# Altium PCB PCB1.PcbDoc
Units mil, origin at the board's own origin, x right, y up, seen from the top; angles counter-clockwise.
Board outline 6000 x 4000 mil, 2 copper layers (Top Layer, Bottom Layer); 27 components, 21 nets, 70 pads, 0 vias.
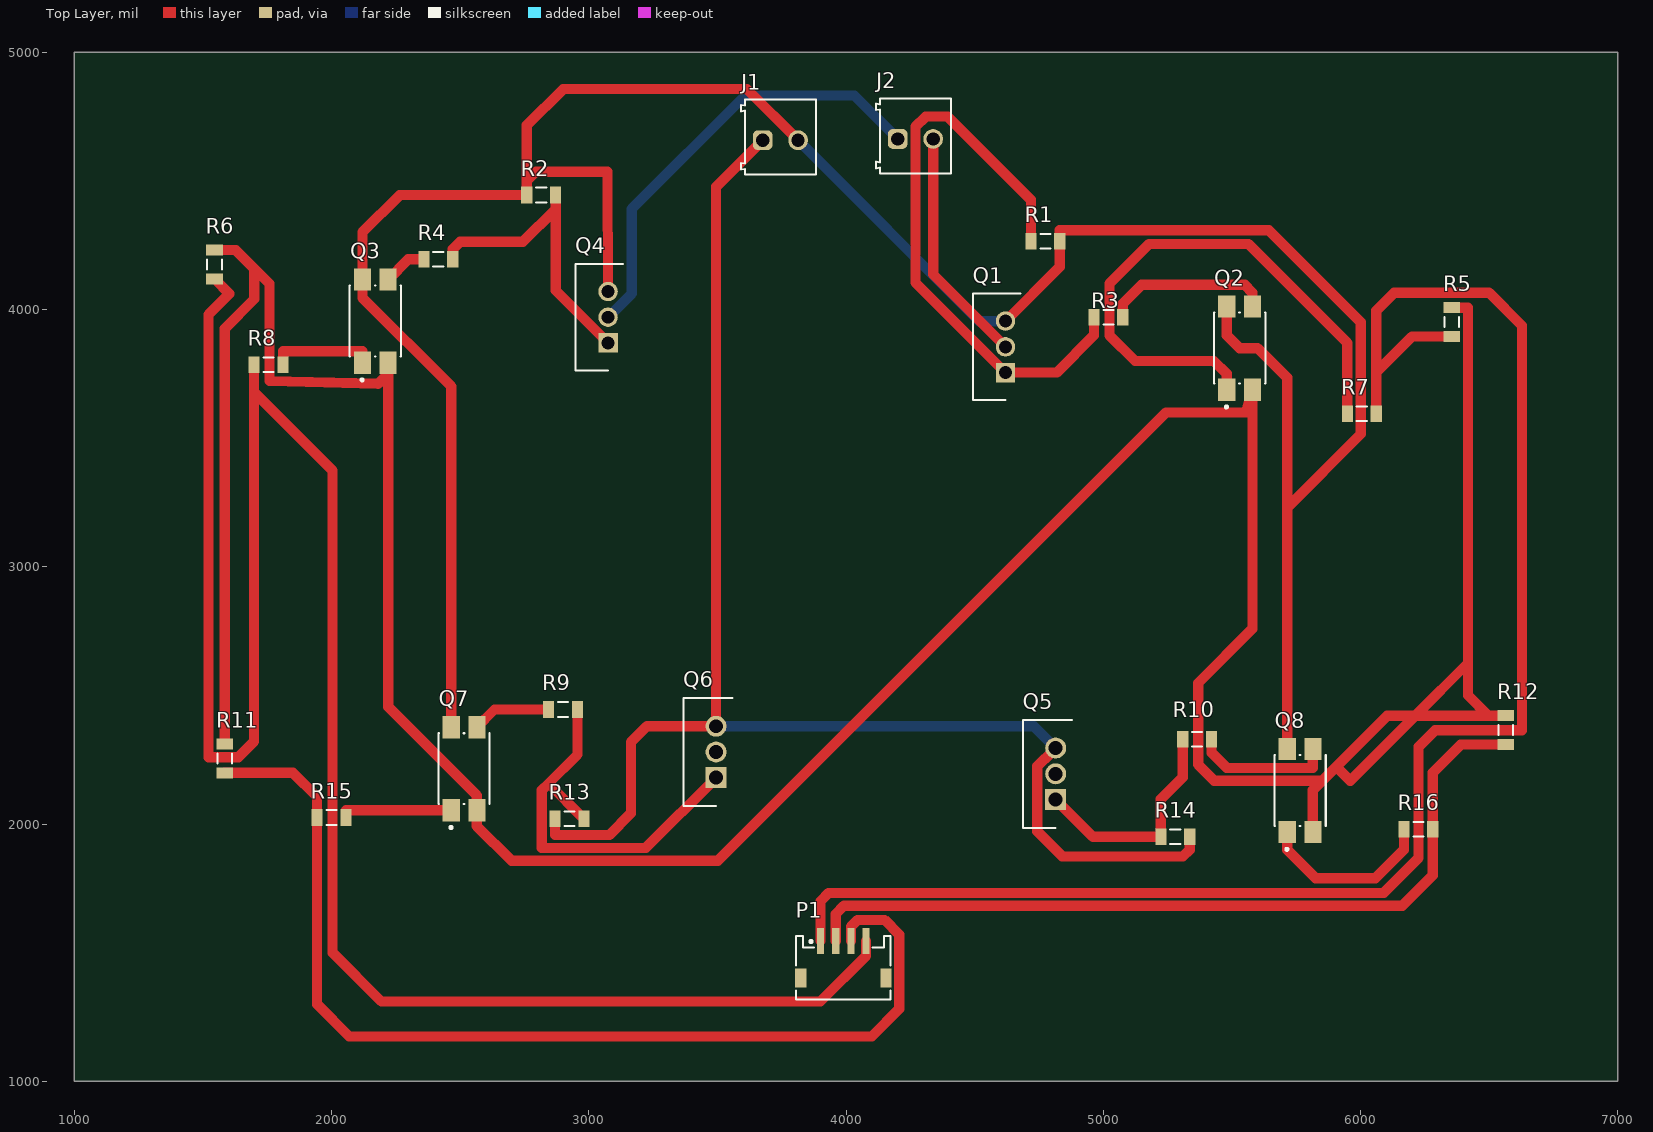
[diagram p0: Top Layer view]
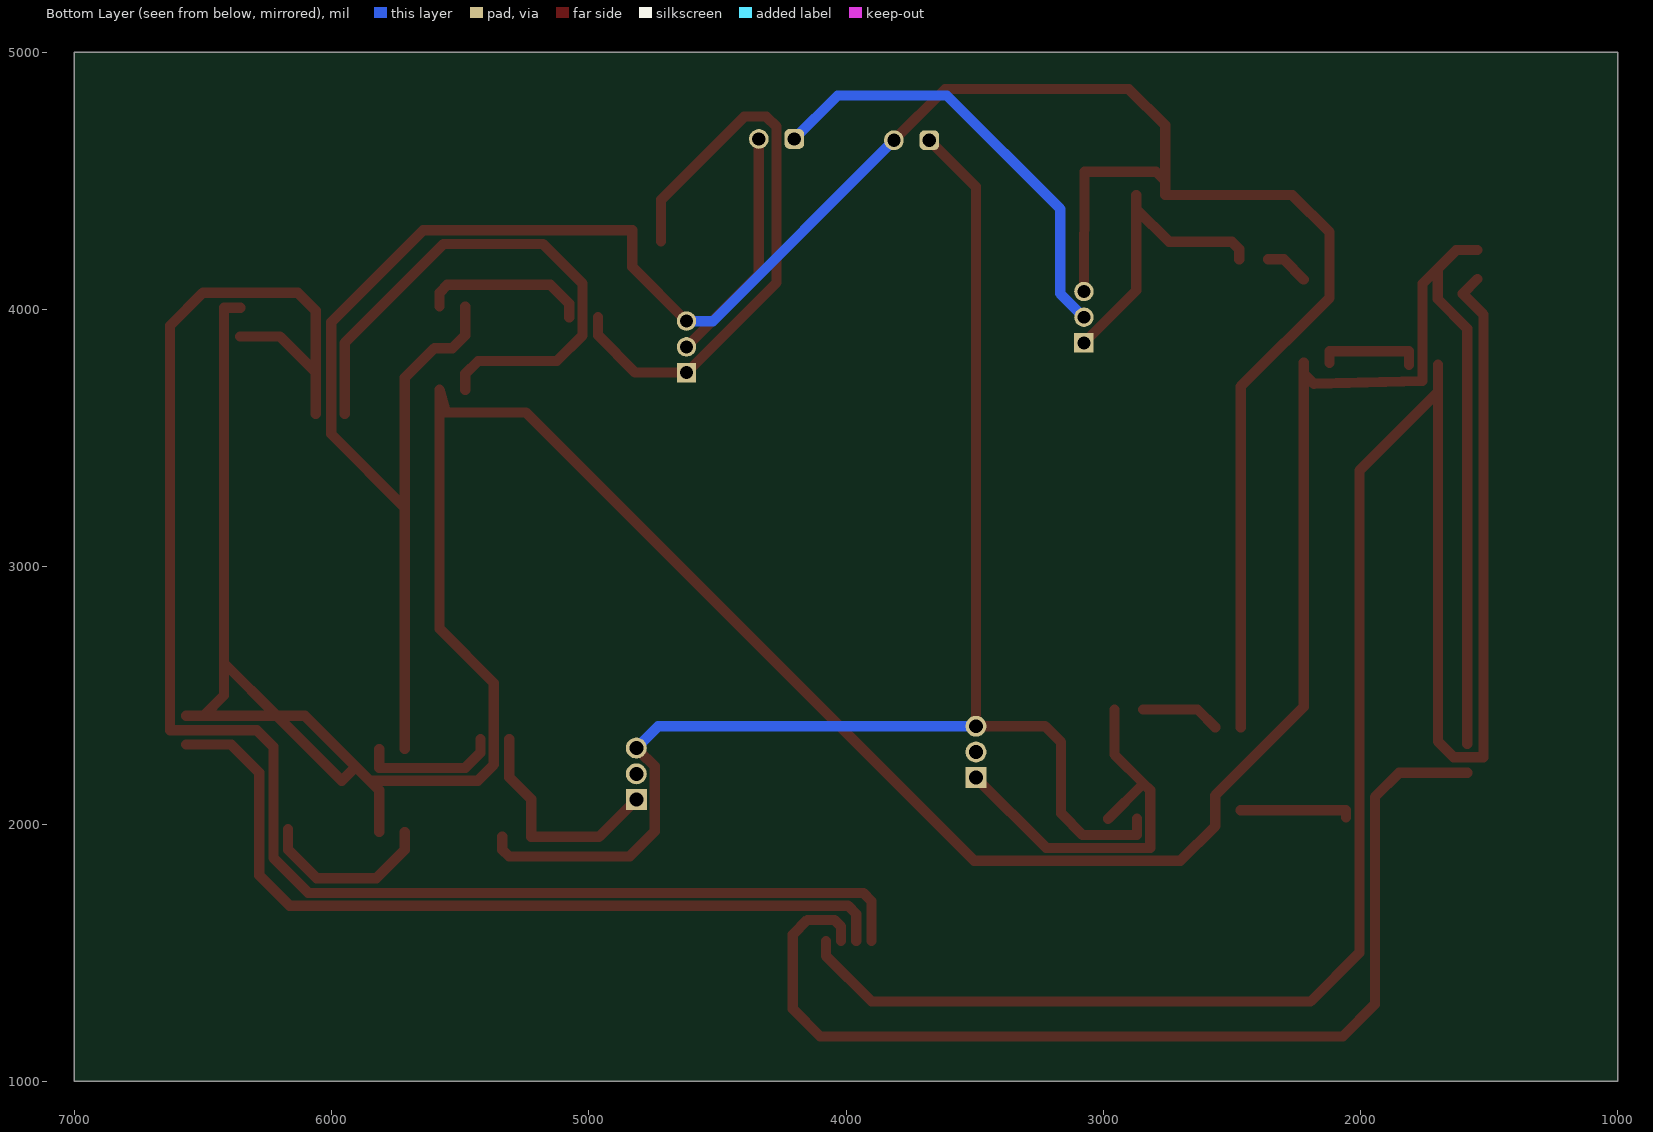
[diagram p1: Bottom Layer view, seen from below]

## Layer stack, top to bottom
Top Solder: solder mask 0.4, Solder Resist, Dk 3.5
Top Layer: signal copper 1.4
Dielectric 1: dielectric 12.6, FR-4, Dk 4.8
Bottom Layer: signal copper 1.4
Bottom Solder: solder mask 0.4, Solder Resist, Dk 3.5

## Board outline
1000,1000 7000,1000 7000,5000 1000,5000

## Design rules (kind name [scope] priority, off if disabled: settings)
Clearance [All] p1: gap=10 ignorepadtopadclearanceinfootprint=FALSE
PolygonConnect [All] p1: connectstyle=Relief reliefconductorwidth=10 reliefentries=4 polygonreliefangle="90 Angle" airgapwidth=10
RoutingVias [All] p1: holewidth=28 width=50 viastyle="Through Hole" minholewidth=28 minwidth=50 maxholewidth=28 maxwidth=50
SolderMaskExpansion [All] p1: expansion=4 istentingtop=FALSE
Width [All] p1: maxlimit=40 minlimit=40 preferedwidth=40 minimp=50.000000 maximp=50.000000 favimp=50.000000
30 further rules are at their usual default settings.

## Components (designator, comment, footprint, x,y, rotation, side; value= is the part's Value field where it differs from the comment)
J1 "691214110002" 691214110002 3745,4670 r0 top
J2 "691214110002" 691214110002 4270,4675 r0 top
P1 "648104131822" 648104131822 3989.53,1440.67 r0 top
Q1 "IRF4905" IRF4905_Footprint 4620,3755 r90 top
Q2 "PC817X4NIP0F" FP-PC817X4NIP0F-MFG 5530,3850 r90 top
Q3 "PC817X4NIP0F" FP-PC817X4NIP0F-MFG 2170,3955 r90 top
Q4 "IRF4905" IRF4905_Footprint 3075,3870 r90 top
Q5 "IRFZ44NPBF" IRFZ44NPBF_FOOTPRINT 4815,2095 r90 top
Q6 "IRFZ44NPBF" IRFZ44NPBF_FOOTPRINT 3495,2180 r90 top
Q7 "PC817X4NIP0F" FP-PC817X4NIP0F-MFG 2515,2215 r90 top
Q8 "PC817X4NIP0F" FP-PC817X4NIP0F-MFG 5765,2130 r90 top
R1 "10K" RESC3216X70X50NL05T20 4775,4265 r0 top
R2 "10K" RESC3216X70X50NL05T20 2815,4445 r0 top
R3 "50" RESC3216X70X50NL05T20 5020,3970 r0 top
R4 "50" RESC3216X70X50NL05T20 2415,4195 r0 top
R5 "10K" RESC3216X70X50NL05T20 6355,3951.1 r90 top
R6 "10K" RESC3216X70X50NL05T20 1545,4175 r90 top
R7 "100" RESC3216X70X50NL05T20 6005,3595 r0 top
R8 "100" RESC3216X70X50NL05T20 1755,3785 r0 top
R9 "50" RESC3216X70X50NL05T20 2900,2445 r0 top
R10 "50" RESC3216X70X50NL05T20 5365,2330 r0 top
R11 "10K" RESC3216X70X50NL05T20 1585,2255 r90 top
R12 "10K" RESC3216X70X50NL05T20 6565,2365 r90 top
R13 "10K" RESC3216X70X50NL05T20 2925,2020 r0 top
R14 "10K" RESC3216X70X50NL05T20 5280,1950 r0 top
R15 "100" RESC3216X70X50NL05T20 2000,2025 r0 top
R16 "100" RESC3216X70X50NL05T20 6225,1980 r0 top

## Footprints (in the part's own frame and the unit in brackets; to place one, negate y for a bottom-side part, rotate by r counter-clockwise, add the part's x,y. Pads: shape width x height; smd on the part's side, far side on the other; paste and mask are expansions set on the pad)
648104131822 [mm] "1.50mm SMT Male Horizontal Shrouded Header, 4p"
  rect 0.7x2.6 smd: 1(-2.25,2.65) 2(-0.75,2.65) 3(0.75,2.65) 4(2.25,2.65)
  rect 1.1x1.9 smd: MP1(-4.2,-1) MP2(4.2,-1)
  silkscreen extent -4.65,-3.13 4.65,3.13, body extent -4.6,-3 4.6,3.47, height 3.74
691214110002 [mm] "3.50 mm Horizontal Entry Modular, 2p"
  rrect50% 1.95x1.95 hole 1.3: 1(-1.75,-0.3)
  round 1.95 hole 1.3: 2(1.75,-0.3)
  silkscreen extent -3.9,-3.7 3.5,3.7, body extent -3.95,-3.7 3.5,3.7, height 8.55
FP-PC817X4NIP0F-MFG [mm]
  rect 2.2x1.7 smd paste+0 mask+0: 1(-4.1,1.27) 2(-4.1,-1.27) 3(4.1,-1.27) 4(4.1,1.27)
  silkscreen extent -5.92,-2.54 3.5,2.54, body extent -5.3,-2.64 5.3,2.64, height 0.25
IRF4905_Footprint [mm]
  rect 1.92x1.92 / inner round 1.92 / far side rect 1.92x1.92 hole 1.28: 1(0,0)
  round 1.92 hole 1.28: 2(2.54,0) 3(5.08,0)
  silkscreen extent -2.73,-1.49 7.81,3.2
IRFZ44NPBF_FOOTPRINT [mm]
  rect 2.07x2.07 / inner round 2.07 / far side rect 2.07x2.07 hole 1.38: 1(0,0)
  round 2.07 hole 1.38: 2(2.54,0) 3(5.08,0)
  silkscreen extent -2.8,-1.61 7.88,3.22
RESC3216X70X50NL05T20 [mm] "Chip Resistor, 2-Leads, Body 3.20x1.60mm, IPC Medium Density"
  rect 1.1x1.65 smd: 1(-1.425,0) 2(1.425,0)
  silkscreen extent -0.5,-0.73 0.5,0.73, body extent -1.63,-0.82 1.62,0.82, height 0.7

## Part data
J1 J2: library part CMP-1502-02464-2, Color="Blue, Green", Current=10A, Max Operating Temperature=105°C, Min Operating Temperature=-40°C, Voltage=300V, Contact Material=Brass, Contact Plating="Brass, Tin", Current Rating=10A, Height=8.7mm, Housing Material=Nylon, Lead Pitch=3.5mm, Length=7.4mm, Mount="Through Hole", NexarPartId=18818288, Number of Contacts=2, Number of Levels=1, Number of Pins=2, Number of Positions Per Level=2, Number of Rows=1, Packaging=Box, Pitch=3.5052mm, Plating="Brass, Steel", REACH SVHC=Unknown, RoHS=Compliant, Stripping Length=-6mm, Termination=Screw, Voltage Rating=300V, Width=7.9mm, Wire Gauge (Max)=24AWG, Wire Gauge (Min)=16AWG, Wire/Cable Gauge=24AWG
P1: library part CMP-1502-00732-2, Color="Beige, White", Contact Resistance=20mΩ, Current Rating=1A, Flammability Rating="UL94 V-0", Insulation Resistance=500MΩ, Max Operating Temperature=85°C, Min Operating Temperature=-25°C, Operating Supply Voltage=50V, Connector Type="Male Pin", Contact Gender=Male, Contact Material=Copper, Contact Plating=Tin, Gender=Male, Height=3.7mm, Housing Material=Nylon, Insulation=Insulated, Lead Pitch=1.5mm, Length=9mm, Mount="Surface Mount", NexarPartId=18818253, Number of Contacts=4, Number of Pins=4, Number of Positions=4, Number of Rows=1, Packaging="Tape and Reel", Pitch=1.5mm, REACH SVHC=Unknown, RoHS=Compliant, Termination=SMD/SMT, Voltage Rating=50V, Width=9mm
Q1 Q4: "MOSFET Transistor, P-Channel, TO-220AB", Manufacturer_Name=Infineon, Mouser Part Number=N/A, Arrow Part Number=IRF4905, Arrow Price/Stock=https://www.arrow.com/en/products/irf4905/international-rectifier?region=nac, Datasheet Link=https://www.infineon.com/dgdl/irf4905pbf.pdf?fileId=5546d462533600a4015355e329b1197e, Geometry.Height=4.69mm, Manufacturer_Part_Number=IRF4905, Mouser Price/Stock=https://www.mouser.co.uk/ProductDetail/Infineon-IR/IRF4905?qs=zO0nedAqnNIhlaIbSqqpvQ%3D%3D
Q2 Q3 Q7 Q8: library part CMP-65434-000001-1, "OPTOISOLATOR 5KV TRANS 4SMD", Collector Emitter Voltage=80V, Emiiter Collector Voltage=6V, Forward Current=20mA, Forward Voltage=1.2V, Isolation Voltage=5kVrms, Manufacturer=Sharp, Max Current Transfer Ratio=600%, Min Current Transfer Ratio=50%, Power Dissipation=200mW, Temperature="-30°C to +100°C", Temperature Range High=+100°C, Temperature Range Low=-30°C, Automotive=No, Category=Trans, ComponentLink2Description=Datasheet, ComponentLink2URL=https://www.sharpsde.com/fileadmin/products/Optoelectronics/Isolation%20Devices/Specs%20Photocoupler/PC817XxNIP0F_17Jun08_Spec_ED-04P129A.pdf, Device Class L1=Optoelectronics, Device Class L2=Optocouplers, Device Class L3=unset, Digikey Description="OPTOISOLATOR 5KV TRANS 4SMD", Height=4.6mm, Lead Free=Yes, Manufacturer Part Number=PC817X4NIP0F, Mouser Description="Transistor Output Optocouplers Photocoupler 300-600% CRT", Octopart=https://octopart.com/pc817x4nip0f-sharp-20650453, Package=PC817X4NIP0F, Reverse Voltage=6V, RoHS=TRUE, Standoff Height=0.1mm
Q5 Q6: "MOSFET N-Channel 55V 49A TO220AB Infineon IRFZ44NPBF N-channel MOSFET Transistor, 49 A, 55 V, 3-Pin TO-220AB", Manufacturer_Name=Infineon, Mouser Part Number=942-IRFZ44NPBF, Arrow Part Number=IRFZ44NPBF, Arrow Price/Stock=https://www.arrow.com/en/products/irfz44npbf/infineon-technologies-ag?region=europe, Datasheet Link=https://www.infineon.com/dgdl/irfz44npbf.pdf?fileId=5546d462533600a40153563b3a9f220d, Geometry.Height=4.83mm, Manufacturer_Part_Number=IRFZ44NPBF, Mouser Price/Stock=https://www.mouser.co.uk/ProductDetail/Infineon-Technologies/IRFZ44NPBF?qs=9%252BKlkBgLFf24zghzPg2f9g%3D%3D
R1 R2 R3 R4 R5 R6 R7 R8 R9 R10 R11 R12 R13 R14 R15 R16: library part CMP-2003-00541-1, Manufacturer=Panasonic, Part Number=ERJ-8GEY0R00V

## Nets (pads, with @x,y where several pads share a name; then routed paths per layer and width w, separated by ;. In a path a pad name is that pad's centre, name@x,y a point inside that pad or via, vN(x,y) a via of type N, cw(c..) or ccw(c..) an arc to the next point about the centre after c; other vN are vias at no path point)
GND: J1.1 Q5.3 Q6.3 R13.1 R14.2 | length 5782
  Top Layer w40: R13.1 2868.9,1957 3080,1957 3164,2041 3164,2318 3226,2380 Q6.3 3495,4477.09 J1.1 ; Q5.3 4772,2252 4771,2252 4744,2225 4744,1971 4841,1874 5310.1,1874 5336.1,1900 R14.2
  Bottom Layer w40: Q6.3 4730,2380 Q5.3
MC_GND: Q2.2 Q3.2 Q7.2 Q8.2 R5.2 R6.2 R11.2 R12.2 | length 14316.4
  Top Layer w40: R6.2 1627.9,4231.1 1700,4159 ; R11.2 1585,3926 1700,4041 1700,4159 ; Q3.2 2220,3750 ; Q8.2 5815,2132 5851,2168 ; R5.2 6418,4007.2 6418,2626 ; R12.2 6496.9,2421.1 ; 1700,4159 1759,4100 1759,3722 2181,3711 2220,3750 ; 2220,3750 2220,2456 2565,2111 Q7.2 2565,1992 2700,1857 3502,1857 5245,3600 5555,3600 Q2.2 5580,2759 5369,2548 5369,2231 5432,2168 5851,2168 ; 5851,2168 5905.5,2222.5 ; 5905.5,2222.5 6104.1,2421.1 6213.1,2421.1 ; 5905.5,2222.5 5960,2168 6213.1,2421.1 ; 6213.1,2421.1 6496.9,2421.1 ; 6213.1,2421.1 6418,2626 ; 6418,2626 6418,2500 6496.9,2421.1
NetJ2_1: J2.1 Q4.2 | length 1745.8
  Bottom Layer w40: Q4.2 3167,4062 3167,4391 3608,4832 4032.29,4832 J2.1
NetJ2_2: J2.2 Q1.2 | length 924.6
  Top Layer w40: J2.2 4338.9,4136.1 Q1.2
NetP1_1: P1.1 R5.1 R7.2 | length 6383
  Top Layer w40: P1.1 3900.94,1700 3932.94,1732 6090,1732 6226,1868 6226,2300 6291,2365 6628,2365 6628,3937 6500,4065 6131,4065 6061.1,3995.1 6061.1,3756.1 ; R7.2 6061.1,3756.1 ; R5.1 6200,3895 6061.1,3756.1
NetP1_2: P1.2 R12.1 R16.2 | length 3217.2
  Top Layer w40: P1.2 3960,1650 3992,1682 6163.1,1682 6281.1,1800 R16.2 6281.1,2200 6390,2308.9 R12.1
NetP1_3: P1.3 R11.1 R15.1 | length 4129.7
  Top Layer w40: R11.1 1850,2198.9 1943.9,2105 R15.1 1943.9,1299.1 2069,1174 4100,1174 4207,1281 4207,1570 4150,1627 4046.06,1627 4019.06,1600 P1.3
NetP1_4: P1.4 R6.1 R8.1 | length 8172.2
  Top Layer w40: R6.1 1602.5,4061.4 1522,3980.9 1522,2259 1637,2259 1698.9,2320.9 1698.9,3678.61 ; R8.1 1698.9,3678.61 ; P1.4 4078.11,1488.11 3900,1310 2194,1310 2004,1500 2004,3373.51 1698.9,3678.61
NetQ1_1: Q1.1 R1.1 R3.1 | length 2335.3
  Top Layer w40: R1.1 4718.9,4427 4395.9,4750 4309.9,4750 4270,4710.1 4270,4105 Q1.1 4818.9,3755 4963.9,3900 R3.1
NetQ2_1: Q2.1 R7.1 | length 2203.2
  Top Layer w40: Q2.1 5480,3750 5430,3800 5124,3800 5024,3900 5024,4100 5179,4255 5564,4255 5948.9,3870.1 R7.1
NetQ2_3: Q2.3 R3.2 | length 654.1
  Top Layer w40: R3.2 5076.1,4023 5149.1,4096 5550,4096 5580,4066 Q2.3
NetQ3_1: Q3.1 R8.2 | length 406.3
  Top Layer w40: R8.2 1811.1,3838 2120,3838 Q3.1
NetQ3_3: Q3.3 R4.1 | length 171.4
  Top Layer w40: Q3.3 2298.58,4195 R4.1
NetQ4_1: Q4.1 R2.2 R4.2 | length 1163.1
  Top Layer w40: R4.2 2471.1,4234.1 2500,4263 2744.1,4263 2871.1,4390 ; R2.2 2871.1,4390 ; Q4.1 2871.1,4073.9 2871.1,4390
NetQ5_1: Q5.1 R10.1 R14.1 | length 884.2
  Top Layer w40: Q5.1 4960,1950 R14.1 5223.9,2097 5308.9,2182 R10.1
NetQ6_1: Q6.1 R9.2 R13.2 | length 1581.2
  Top Layer w40: R9.2 2956.1,2270 2843.6,2157.5 ; R13.2 2843.6,2157.5 ; Q6.1 3222,1907 2817,1907 2817,2130.9 2843.6,2157.5
NetQ7_1: Q7.1 R15.2 | length 437.5
  Top Layer w40: R15.2 2056.1,2053.58 Q7.1
NetQ7_3: Q7.3 R9.1 | length 307.3
  Top Layer w40: Q7.3 2633.58,2445 R9.1
NetQ8_1: Q8.1 R16.1 | length 694.4
  Top Layer w40: Q8.1 5715,1900 5826,1789 6057.9,1789 6168.9,1900 R16.1
NetQ8_3: Q8.3 R10.2 | length 544.8
  Top Layer w40: R10.2 5421.1,2277 5480.1,2218 5815,2218 Q8.3
VCC: J1.2 Q1.3 Q2.4 Q3.4 Q4.3 Q7.4 Q8.4 R1.2 R2.1 | length 10580.5
  Top Layer w40: Q7.4 2465,3701 2120,4046 Q3.4 2120,4300 2265,4445 R2.1 2758.9,4500 ; Q4.3 3073.1,4535.9 2794.8,4535.9 2758.9,4500 ; J1.2 3615.09,4857 2900,4857 2758.9,4715.9 2758.9,4500 ; Q1.3 4831.1,4166.1 R1.2 4831.1,4308 5644,4308 6001,3951 6001,3516 5715,3230 ; Q2.4 5480,3900 5530,3850 5600,3850 5715,3735 5715,3230 ; Q8.4 5715,3230
  Bottom Layer w40: J1.2 4517.09,3955 Q1.3
pads on no net: P1.MP1 P1.MP2 Q5.2 Q6.2